# Altium PCB Master.PcbDoc
Units mm, origin at the board's own origin, x right, y up, seen from the top; angles counter-clockwise.
Board outline 100 x 130 mm, 2 copper layers (Top Layer, Bottom Layer); 48 components, 31 nets, 147 pads, 0 vias.
Unrouted connection lines stored in the file: 102.
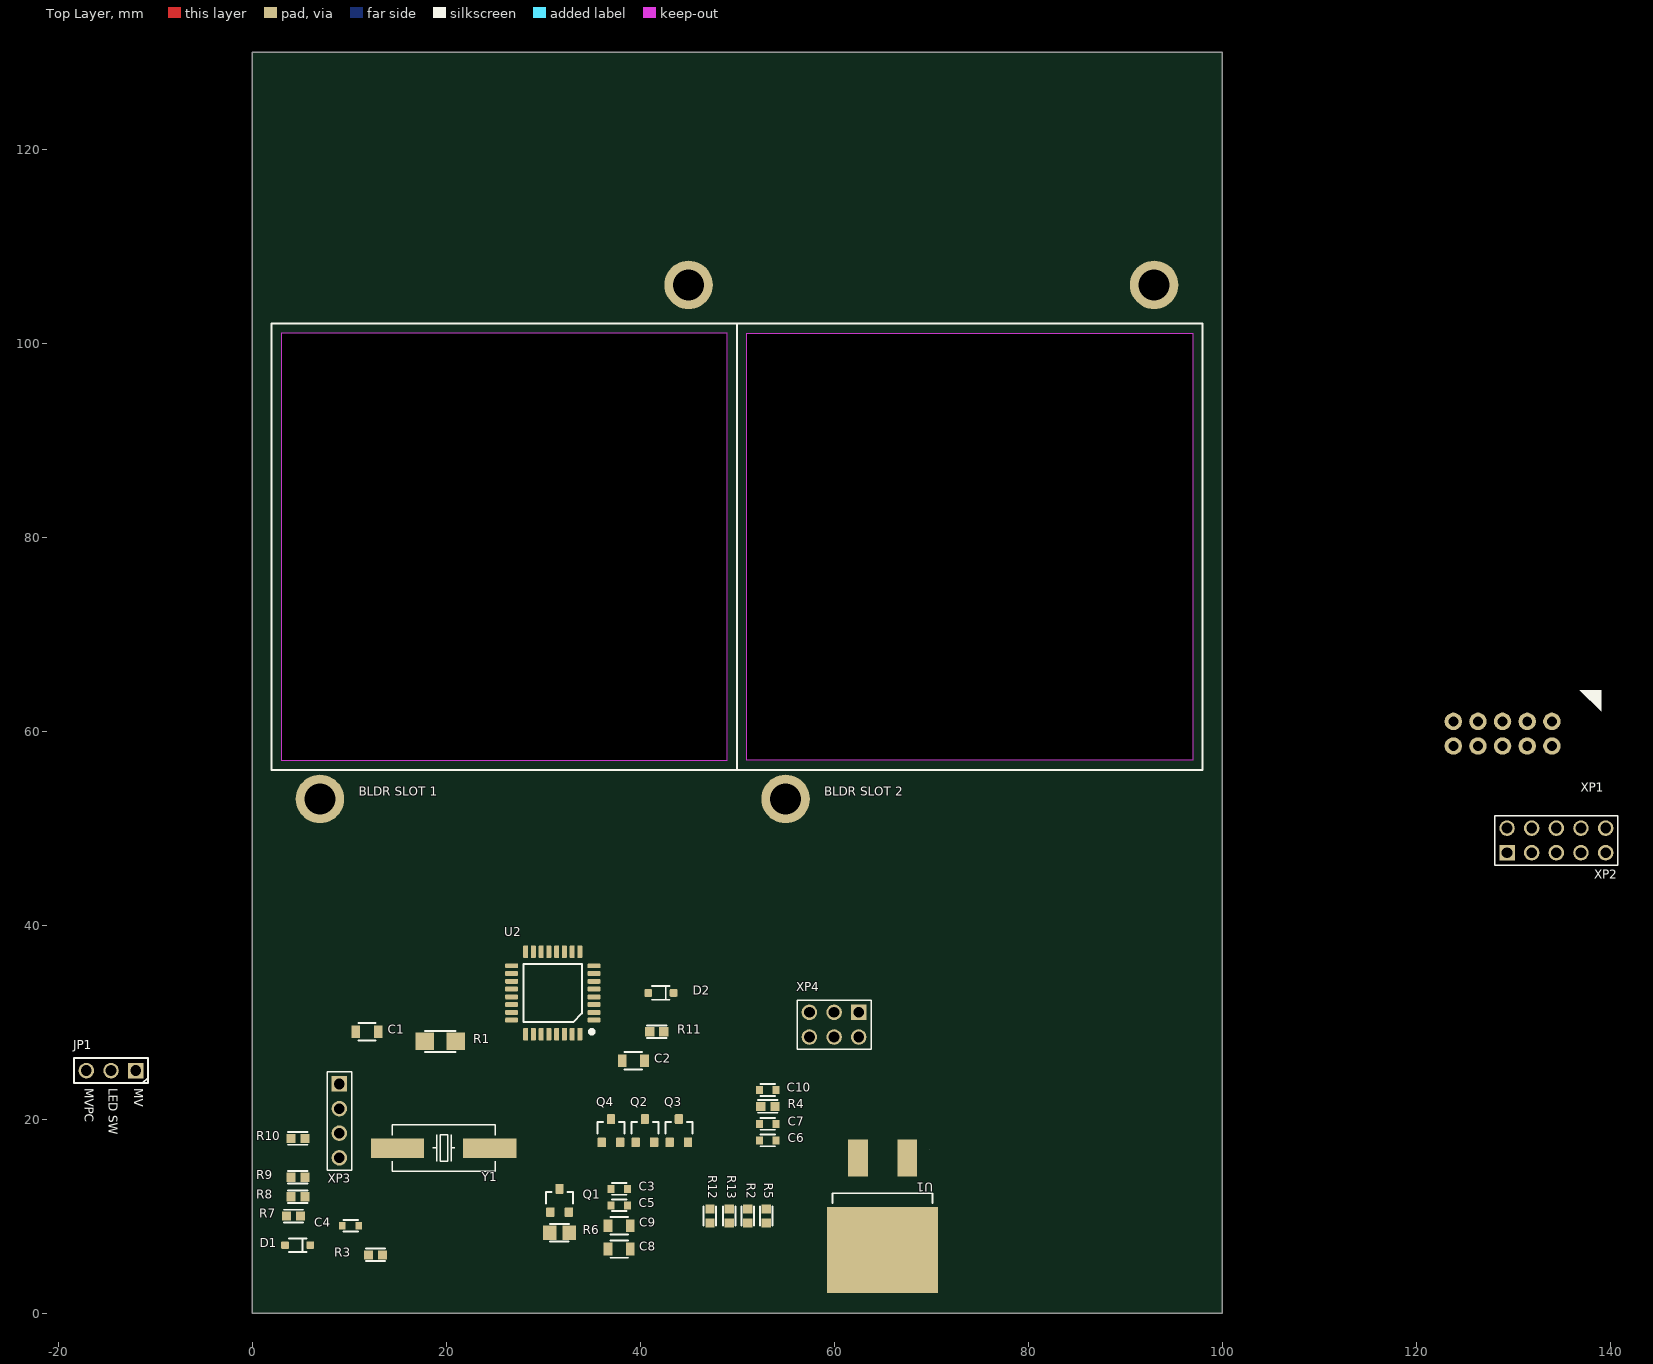
[diagram p0: Top Layer view]
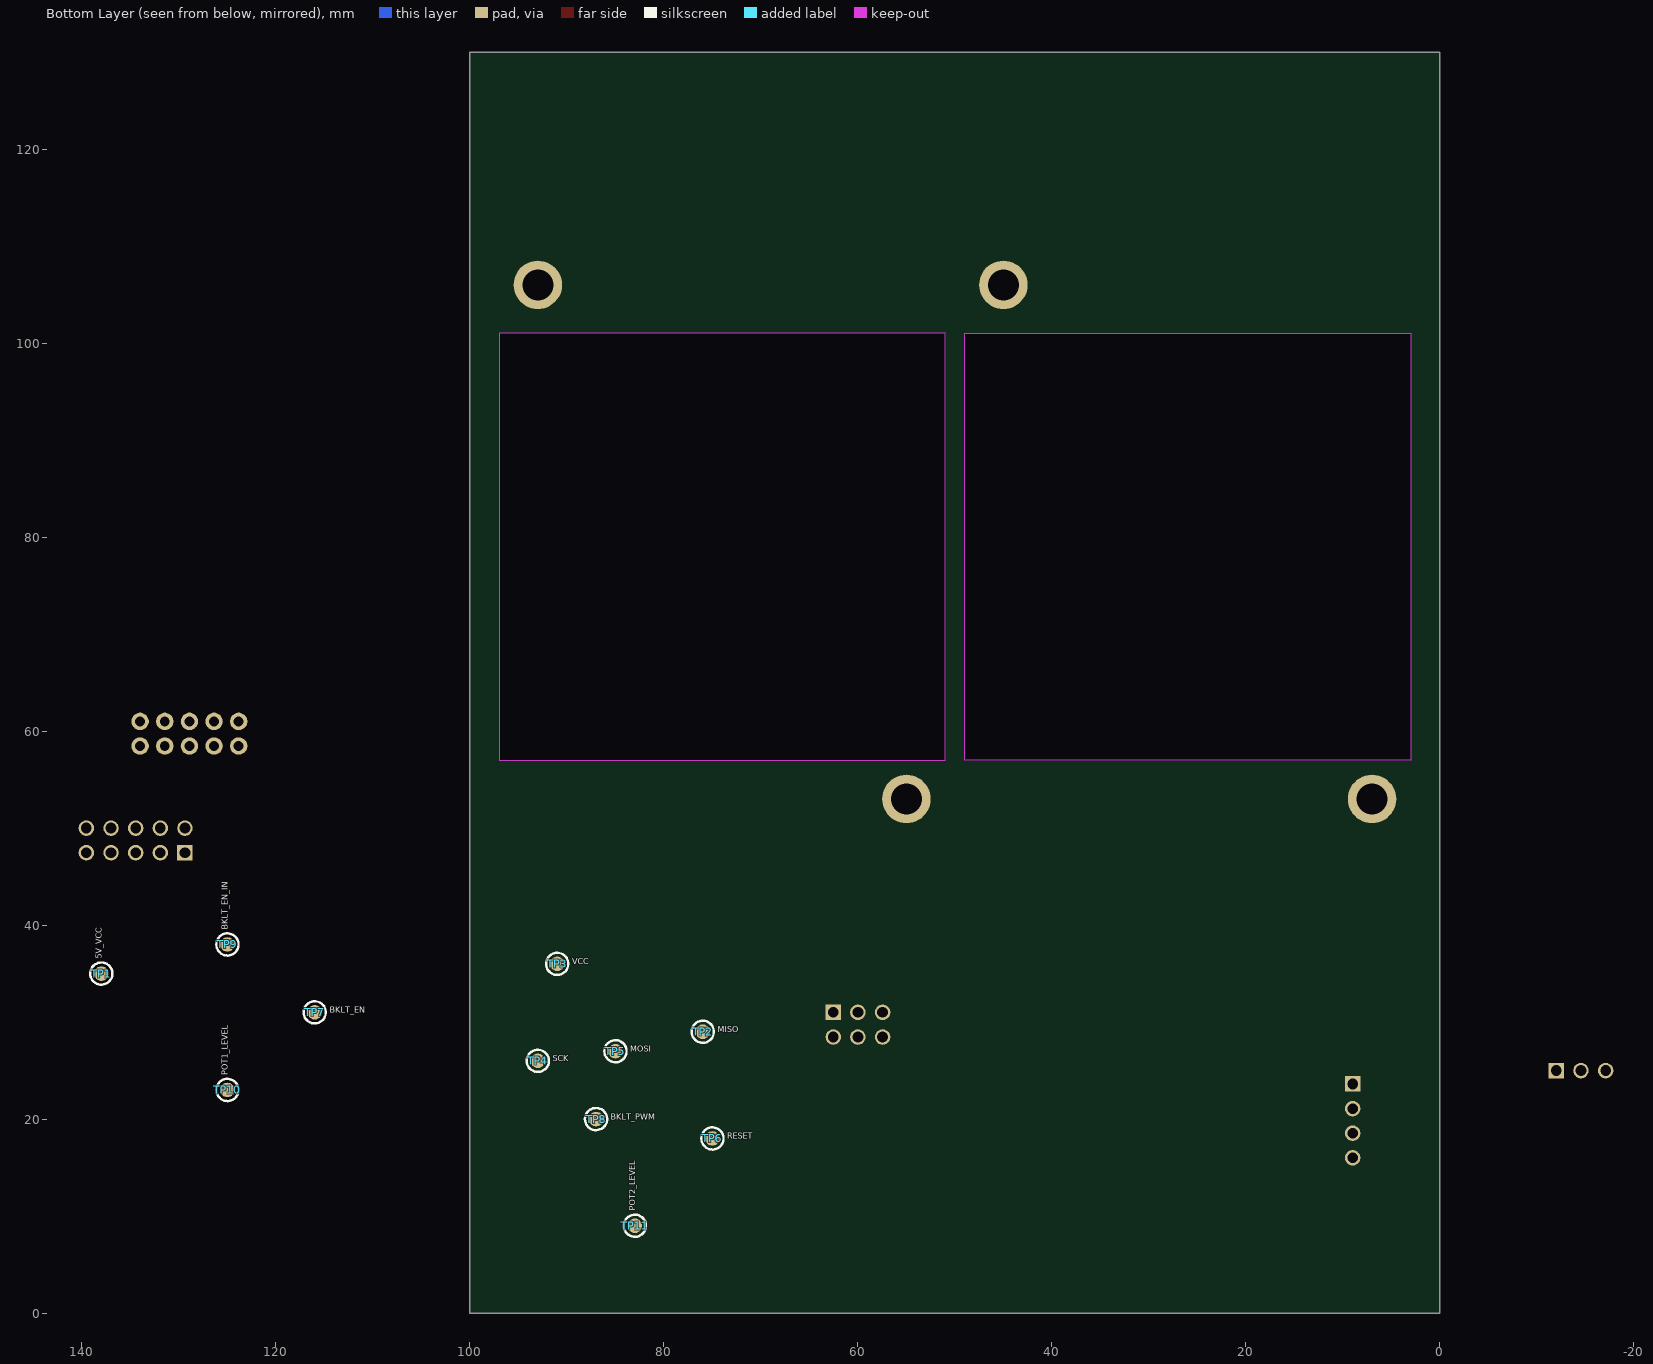
[diagram p1: Bottom Layer view, seen from below]

## Layer stack, top to bottom
Top Solder: solder mask 0.0102, Solder Resist, Dk 3.5
Top Layer: signal copper 0.0356
Dielectric 1: dielectric 0.32, FR-4, Dk 4.8
Bottom Layer: signal copper 0.0356
Bottom Solder: solder mask 0.0102, Solder Resist, Dk 3.5

## Board outline
0,0 100,0 100,130 0,130
cut-out: 51,101 97,101 97,57 51,57
cut-out: 49,101 3,101 3,57 49,57

## Design rules (kind name [scope] priority, off if disabled: settings)
Clearance [All] p1: gap=0.254 ignorepadtopadclearanceinfootprint=FALSE except(0: Arc-Hole Track-Hole SMDPad-Hole THPad-Hole Via-Hole Fill-Hole Poly-Hole Region-Hole Text-Hole)
PolygonConnect [All] p1: connectstyle=Relief reliefconductorwidth=0.254 reliefentries=4 polygonreliefangle="90 Angle" airgapwidth=0.254
RoutingVias [All] p1: holewidth=0.711 width=1.27 viastyle="Through Hole" minholewidth=0.711 minwidth=1.27 maxholewidth=0.711 maxwidth=1.27
SolderMaskExpansion [All] p1: expansion=0.102
Width [All] p1: maxlimit=3 minlimit=0.254 preferedwidth=0.254
30 further rules are at their usual default settings.

## Components (designator, comment, footprint, x,y, rotation, side; value= is the part's Value field where it differs from the comment)
C1 "0805-X7R-100-0.33 мкф K" CAP_0805 11.85,29 r0 top
C2 "0805-X7R-50-0.1 мкф K Hitano" CAP_0805 39.3,26 r0 top
C3 "0603-X7R-50-0.47 мкф" CAP_0603 37.85,12.8 r180 top
C4 "0603-X7R-50-0.47 мкф" CAP_0603 10.15,9 r180 top
C5 "0603-X7R-50-0.1 мкф" CAP_0603 37.85,11.1 r180 top
C6 "0603-NP0-50-22 пф F" CAP_0603 53.15,17.8 r0 top
C7 "0603-NP0-50-22 пф F" CAP_0603 53.15,19.5 r180 top
C8 "0805-X7R-50-1 мкф" CAP_0805 37.85,6.6 r180 top
C9 "0805-X7R-50-1 мкф" CAP_0805 37.85,9 r180 top
C10 "0603-X7R-50-0.1 мкф" CAP_0603 53.15,23 r180 top
D1 "BZX384B5V1" "SOD_323 (SC-76)" 4.7,7 r0 top
D2 "BZX384B5V1" "SOD_323 (SC-76)" 42.15,33 r0 top value=B5V1
JP1 "" "CONN_JUMPER 3PIN 2.54MM" -12,25 r180 top
Q1 "MMUN2214LT1G" SOT_23 31.7,11.6 r0 top
Q2 "MMUN2214LT1G" SOT_23 40.5,18.8 r0 top
Q3 "MMUN2214LT1G" SOT_23 44,18.8 r0 top
Q4 "MMUN2214LT1G" SOT_23 37,18.8 r0 top
R1 "1206-3 J" resistor_1206 19.4,28 r0 top value=3
R2 "0603-4.7 к J" resistor_0603 51.1,10 r270 top value=4.7k
R3 "0603-10к J" resistor_0603 12.725,6 r0 top value=10k
R4 "0603-2.4 к F" resistor_0603 53.175,21.3 r180 top value=2.4k
R5 "0603-1 к J" RESistor_0603 53,10 r90 top value=1k
R6 "0805-100 J" resistor_0805 31.7,8.3 r180 top value=100
R7 "0603-10к J" resistor_0603 4.275,10 r0 top value=10k
R8 "0603-4.7 к J" resistor_0603 4.725,12 r0 top value=4.7k
R9 "0603-4.7 к J" resistor_0603 4.725,14 r180 top value=4.7k
R10 "0603-4.7 к J" resistor_0603 4.725,18 r180 top value=4.7k
R11 "0603-4.7 к J" resistor_0603 41.725,29 r180 top value=4.7k
R12 "0603-1 к J" RESistor_0603 47.2,10 r270 top value=1k
R13 "0603-1 к J" RESistor_0603 49.2,10 r270 top value=1k
TP1 "5V_VCC" OTHER_SMD_TP_1.5MM 138,35 r90 bottom
TP2 "MISO" OTHER_SMD_TP_1.5MM 76,29 r180 bottom
TP3 "VCC" OTHER_SMD_TP_1.5MM 91,36 r180 bottom
TP4 "SCK" OTHER_SMD_TP_1.5MM 93,26 r180 bottom
TP5 "MOSI" OTHER_SMD_TP_1.5MM 85,27 r180 bottom
TP6 "RESET" OTHER_SMD_TP_1.5MM 75,18 r180 bottom
TP7 "BKLT_EN" OTHER_SMD_TP_1.5MM 116,31 r180 bottom
TP8 "BKLT_PWM" OTHER_SMD_TP_1.5MM 87,20 r180 bottom
TP9 "BKLT_EN_IN" OTHER_SMD_TP_1.5MM 125,38 r90 bottom
TP10 "POT1_LEVEL" OTHER_SMD_TP_1.5MM 125,23 r90 bottom
TP11 "POT2_LEVEL" OTHER_SMD_TP_1.5MM 83,9 r90 bottom
U1 "L7805ACD2T" D2-PAK 65,10 r270 top
U2 "ATMEGA8-16AU" TQFP_32 31,33 r180 top
XP1 "IDC-10" CONN_IDC-10 128.92,59.73 r90 top
XP2 "PLD-10" CONN_PLD-10 134.46,48.73 r0 top
XP3 "PLS-4" CONN_PLS-4 9,19.81 r270 top
XP4 "PLS-6" CONN_PLD-6 60,29.73 r180 top
Y1 "14.7456 MHz" CRYSTAL_HC-49S 19.75,17 r0 top

## Footprints (in the part's own frame and the unit in brackets; to place one, negate y for a bottom-side part, rotate by r counter-clockwise, add the part's x,y. Pads: shape width x height; smd on the part's side, far side on the other; paste and mask are expansions set on the pad)
CAP_0603 [mm] "Chip Capacitor, 2-Leads, Body 1,60x0,80mm, IPC Medium Density"
  rect 0.7x0.8 smd: 1(-0.85,0) 2(0.85,0)
  silkscreen extent -0.75,-0.6 0.75,0.6, body extent -0.8,-0.41 0.8,0.41, height 0.92
CAP_0805 [mm] "Chip Capacitor, 2-Leads, Body 2,00x1,25mm, IPC Medium Density"
  rect 0.9x1.3 smd: 1(-1.15,0) 2(1.15,0)
  silkscreen extent -0.9,-0.9 0.9,0.9, body extent -1,-0.63 1,0.64, height 1.32
CONN_IDC-10 [mm]
  round 1.8 hole 1.02: 1(1.27,-5.08) 2(-1.27,-5.08) 3(1.27,-2.54) 4(-1.27,-2.54) 5(1.27,0) 6(-1.27,0) 7(1.27,2.54) 8(-1.27,2.54) 9(1.27,5.08) 10(-1.27,5.08)
  silkscreen extent 2.3,-10.18 4.5,-7.98, body extent -4.6,-10.2 4.4,10.15, height 9.1
"CONN_JUMPER 3PIN 2.54MM" [mm] "3 pins, 1 row"
  rect 1.6x1.6 hole 1.1: 1(0,0)
  round 1.6 hole 1.1: 2(2.54,0) 3(5.08,0)
  silkscreen extent -1.27,-1.28 6.35,1.26, body extent -1.27,-1.24 6.35,1.25, height 8.54
CONN_PLD-6 [mm]
  rect 1.6x1.6 hole 1.1: 1(-2.54,-1.27)
  round 1.6 hole 1.1: 2(-2.54,1.27) 3(0,-1.27) 4(0,1.27) 5(2.54,-1.27) 6(2.54,1.27)
  silkscreen extent -3.81,-2.54 3.81,2.54, body extent -3.81,-2.54 3.81,2.54, height 8.5
CONN_PLD-10 [mm]
  rect 1.6x1.6 hole 1.1: 1(-5.08,-1.27)
  round 1.6 hole 1.1: 2(-5.08,1.27) 3(-2.54,-1.27) 4(-2.54,1.27) 5(0,-1.27) 6(0,1.27) 7(2.54,-1.27) 8(2.54,1.27) 9(5.08,-1.27) 10(5.08,1.27)
  silkscreen extent -6.35,-2.54 6.35,2.54, body extent -6.35,-2.54 6.35,2.54, height 8.5
CONN_PLS-4 [mm]
  rect 1.6x1.6 hole 1.1: 1(-3.81,0)
  round 1.6 hole 1.1: 2(-1.27,0) 3(1.27,0) 4(3.81,0)
  silkscreen extent -5.08,-1.27 5.08,1.27, body extent -5.08,-1.27 5.08,1.27, height 8.5
CRYSTAL_HC-49S [mm]
  rect 5.5x2 smd: 1(-4.75,0) 2(4.75,0)
  silkscreen extent -5.3,-2.4 5.3,2.4, body extent -6.18,-2.35 6.12,2.35, height 4.35
D2-PAK [mm] "D2-PAK, 3-Pads, Body 7,55x8,52mm (max), IPC Medium Density"
  rect 3.81x2.03 smd: 1(-6,2.54) 3(-6,-2.54)
  rect 8.9x11.43 smd mask-15: 2(3.5,0)
  silkscreen extent -2.35,-5.15 -1.35,5.15, body extent -7.4,-5.15 7.85,5.15, height 4.82
OTHER_SMD_TP_1.5MM [mm] "Test point"
  round 1.5 smd: 1(0,0)
  silkscreen extent -1.14,-1.14 1.14,1.14
resistor_0603 [mm] "Chip Capacitor, 2-Leads, Body 1,60x0,80mm, IPC Medium Density"
  rect 0.95x0.95 smd: 1(-0.725,0) 2(0.725,0)
  silkscreen extent -1,-0.65 1,0.65, body extent -0.8,-0.4 0.8,0.4, height 0.5
RESistor_0603 [mm] "Chip Capacitor, 2-Leads, Body 1,60x0,80mm, IPC Medium Density"
  rect 0.95x0.95 smd: 1(-0.725,0) 2(0.725,0)
  silkscreen extent -1,-0.65 1,0.65, body extent -0.8,-0.4 0.8,0.4, height 0.5
resistor_0805 [mm] "Chip Resistor, 2-Leads, Body 2,00x1,25mm, IPC Medium Density"
  rect 1.4x1.5 smd: 1(-1,0) 2(1,0)
  silkscreen extent -1,-0.9 1,0.9, body extent -1,-0.6 1,0.6, height 0.5
resistor_1206 [mm] "Chip Resistor, 2-Leads, Body 3,15x1,60mm, IPC Medium Density"
  rect 1.9x1.8 smd: 1(-1.6,0) 2(1.6,0)
  silkscreen extent -1.6,-1.1 1.6,1.1, body extent -1.6,-0.8 1.6,0.8, height 0.6
"SOD_323 (SC-76)" [mm]
  rrect30% 0.8x0.8 smd: A(-1.3,0) C(1.3,0)
  silkscreen extent -0.9,-0.7 0.9,0.7, body extent -1.35,-0.65 1.35,0.6, height 1.1
SOT_23 [mm] "SOT-23; 3 Leads; Body 3.0 x 2.5 mm, inc. leads (LxW max)"
  rrect20% 0.85x1 smd: 1(-0.95,-1.2) 2(0.95,-1.2) 3(0,1.2)
  silkscreen extent -1.4,-0.3 1.4,0.9, body extent -1.5,-1.5 1.5,1.5, height 1.3
TQFP_32 [mm] "QFP; 32 Leads; Body 7 x 7 mm; Pitch 0.8 mm"
  rrect30% 1.3x0.5 smd: 1(-4.25,2.8) 2(-4.25,2) 3(-4.25,1.2) 4(-4.25,0.4) 5(-4.25,-0.4) 6(-4.25,-1.2) 7(-4.25,-2) 8(-4.25,-2.8) 17(4.25,-2.8) 18(4.25,-2) 19(4.25,-1.2) 20(4.25,-0.4) 21(4.25,0.4) 22(4.25,1.2) 23(4.25,2) 24(4.25,2.8)
  rrect30% 0.5x1.3 smd: 9(-2.8,-4.25) 10(-2,-4.25) 11(-1.2,-4.25) 12(-0.4,-4.25) 13(0.4,-4.25) 14(1.2,-4.25) 15(2,-4.25) 16(2.8,-4.25) 25(2.8,4.25) 26(2,4.25) 27(1.2,4.25) 28(0.4,4.25) 29(-0.4,4.25) 30(-1.2,4.25) 31(-2,4.25) 32(-2.8,4.25)
  silkscreen extent -4.15,-3 3,4.12, body extent -4.51,-4.51 4.51,4.51, height 1.1

## Part data
C1: "Конденсатор Чип Керамический", Voltage=100V, Cap=0.33u, Foot=0805
C2: library part "0805-X7R-50-0.1 мкф K", "Конденсатор Чип Керамический", Voltage=50V, Cap=0.1u, Foot=0805
C3 C4 C5 C8 C9 C10: "Конденсатор Чип Керамический", Voltage=50V
  C3 C4: Cap=0.47u, Foot=0603
  C5 C10: Cap=0.1u, Foot=0603, Price, $=0.1
  C8 C9: Cap=1u, Foot=0805
C6 C7: "Конденсатор Чип Керамический", Tolerance=1%, Voltage=50V, Cap=22p, Foot=0603
JP1: library part "CONN_JUMPER 2.54 MM"
Q1 Q2 Q3 Q4: library part "MMUN2214LT1G_50V 0.1A 0.25W", "NPN Digital Transistor", PackageDocument=May-1999, DatasheetDocument=Jun-1999, PackageReference=SOT23, Published=17-Sep-2003, Publisher="Altium Limited"
R1: "Резистор Чип", Power=0.25W, Foot=1206
R2 R5 R8 R9 R10 R11 R12 R13: "Резистор Чип", Power=0.1W, Foot=0603, Price, $=0.015
R3 R7: library part "0603-10 к J", "Резистор Чип", Power=0.1W, Foot=0603, Price, $=0.015
R4: library part "0603-2.49 к F", "Резистор Чип", Power=0.1W, Tolerance=1%, Foot=0603
R6: "Резистор Чип", Power=0.125W, Foot=0805
TP1 TP2 TP3 TP4 TP5 TP6 TP7 TP8 TP9 TP10 TP11: library part "Test Point_1.5MM"
U1: library part LDO_L7805ACD2T-TR, "Стабилизатор напряжения +5В 1.5А, [D2-PAK]", LatestRevisionDate=29-May-2009, LatestRevisionNote="IPC-7351 Footprint Added.", PackageDescription="3-Pin Transistor Outline Package 2.54 mm Pitch, 15.1 mm Lead Span", PackageReference=D2PAK, Published=24-Mar-1999, Publisher="Altium Limited"
U2: library part MCU_ATMEGA8-16AU, "AVR AVRA® ATmega Microcontroller IC 8-Bit 16MHz 8KB _4K x 16_ FLASH 32-TQFP _7x7_", Package="TQFP-32 Microchip Technology", Availability=Unavailable, MF="Microchip Technology", MP=ATMEGA8-16AU, Price=None, SnapEDA_Link=https://www.snapeda.com/parts/ATMEGA8-16AU/Microchip/view-part/4246640/?ref=snap
XP1: library part "CONN_IDC-10 (Single Row)", "Header, 10-Pin", LatestRevisionDate=17-Jul-2002, LatestRevisionNote="Re-released for DXP Platform.", Publisher="Altium Limited"
XP2: library part "CONN_Header 10 (Single Row)_1", "Header, 10-Pin", LatestRevisionDate=17-Jul-2002, LatestRevisionNote="Re-released for DXP Platform.", Publisher="Altium Limited"
XP3: library part CONN_PLS-4, "Header, 4-Pin", LatestRevisionDate=17-Jul-2002, LatestRevisionNote="Re-released for DXP Platform.", Publisher="Altium Limited"
XP4: library part CONN_PLS-6, "Header, 6-Pin", LatestRevisionDate=17-Jul-2002, LatestRevisionNote="Re-released for DXP Platform.", Publisher="Altium Limited"
Y1: library part "CRYSTAL_14.7456 MHz", "14.7456 МГц имп. HC-49SM, Кварцевый резонатор", LatestRevisionDate=17-Jul-2002, LatestRevisionNote="Re-released for DXP Platform.", PackageDescription="Crystal, Thru-Hole; 2 Leads; Body 3.1 x 8.2 mm (Dia.xH)", PackageReference=R38, Published=8-Jun-2000, Publisher="Altium Limited"
D1 D2: HelpURL="L:\Dev\Техническая документация\Стабилитроны\BZX384_series_Vishay.pdf", Price, $=0.3

## Free pads (board coordinates)
  round 5 hole 3.2: 4(7,53) 5(45,106) 6(93,106) 7(55,53)

## Nets (pads, with @x,y where several pads share a name; then routed paths per layer and width w, separated by ;. In a path a pad name is that pad's centre, name@x,y a point inside that pad or via, vN(x,y) a via of type N, cw(c..) or ccw(c..) an arc to the next point about the centre after c; other vN are vias at no path point)
+12: C1.1 R9.2 U1.1 XP2.1 XP2.2 XP2.3 XP3.1
AIN0: C4.1 R3.1 R4.2 U2.10
ENABLE_OUT: Q3.3 R10.1 TP7.1 XP2.7 XP2.8
GND: C1.2 C2.2 C3.2 C4.2 C5.2 C6.2 C7.2 C9.2 C10.2 D1.A D2.A JP1.1 Q2.2 Q3.2 Q4.2 R4.1 U1.2 U2.3 U2.5 U2.21 XP1.3 XP1.4 XP2.4 XP2.5 XP2.6 XP3.4 XP4.6
MISO: TP2.1 U2.16 XP4.1
MOSI: TP5.1 U2.15 XP4.4
NetC2_1: C2.1 R1.1 U1.3
NetC5_1: C5.1 U2.20
NetC6_1: C6.1 U2.7 Y1.1
NetC7_1: C7.1 U2.8 Y1.2
NetC8_2: C8.2 C9.1 R5.1 U2.23
NetC10_1: C10.1 Q2.1 R8.2
NetJP1_2: JP1.2 Q1.2
NetQ1_3: Q1.3 R6.1
NetQ2_3: Q2.3 Q3.1 R9.1
NetR6_2: R6.2 XP1.7 XP1.8
NetR12_1: R12.1 U2.30
NetR13_1: R13.1 U2.31
ON: R7.2 R8.1 TP9.1 XP3.3
ON_INV: D1.C R7.1 U2.11
PLED_N: JP1.3 XP3.2
POT1: R5.2 TP10.1 U2.32 XP1.5
POT2: TP11.1 U2.1 XP1.6
PWM_INV: Q4.1 U2.13
PWM_LED: Q1.1 U2.14
PWM_OUT: Q4.3 R11.1 TP8.1 XP2.9 XP2.10
RESET: C3.1 R2.1 TP6.1 U2.29 XP4.5
RXD: R12.2
SCK: TP4.1 U2.17 XP4.3
TXD: R13.2
VCC: C8.1 D2.C R1.2 R2.2 R3.2 R10.2 R11.2 TP1.1 TP3.1 U2.4 U2.6 U2.18 XP1.1 XP1.2 XP1.9 XP1.10 XP4.2
pads on no net: U2.2 U2.9 U2.12 U2.19 U2.22 U2.24 U2.25 U2.26 U2.27 U2.28

## Polygon pours and split planes (outlines as drawn)
no net on Top Layer "Top Layer-No Net" (solid, pour order 4): 66.54,46

## Other copper
Top Layer:
  pour cut-out: 66,55

## Silkscreen, mask and mechanical layers (free items; w line width, h text height)
Top Overlay:
  lines w0.2: 50,56 98,56 98,102 50,102 ; 50,56 50,102 ; 50,56 50,102 ; 50,56 2,56 2,102 50,102
  text "BLDR SLOT 1" at 11,53 h1.52
  text "BLDR SLOT 2" at 59,53 h1.52
  text "MVPC" at -17.58,23.2 h1.52 r270
  text "LED SW" at -15.08,23.2 h1.52 r270
  text "MV" at -12.48,23.2 h1.52 r270

## Dimensions
100,0 to 100,130 on Mechanical 16
0,0 to 100,0 on Mechanical 16